# Altium PCB ZERO.PcbDoc
Units mil, origin at the board's own origin, x right, y up, seen from the top; angles counter-clockwise.
Board outline 1865.19 x 1094.19 mil, 2 copper layers (Top Layer, Bottom Layer); 47 components, 42 nets, 267 pads, 78 vias.
Unrouted connection lines stored in the file: 47.
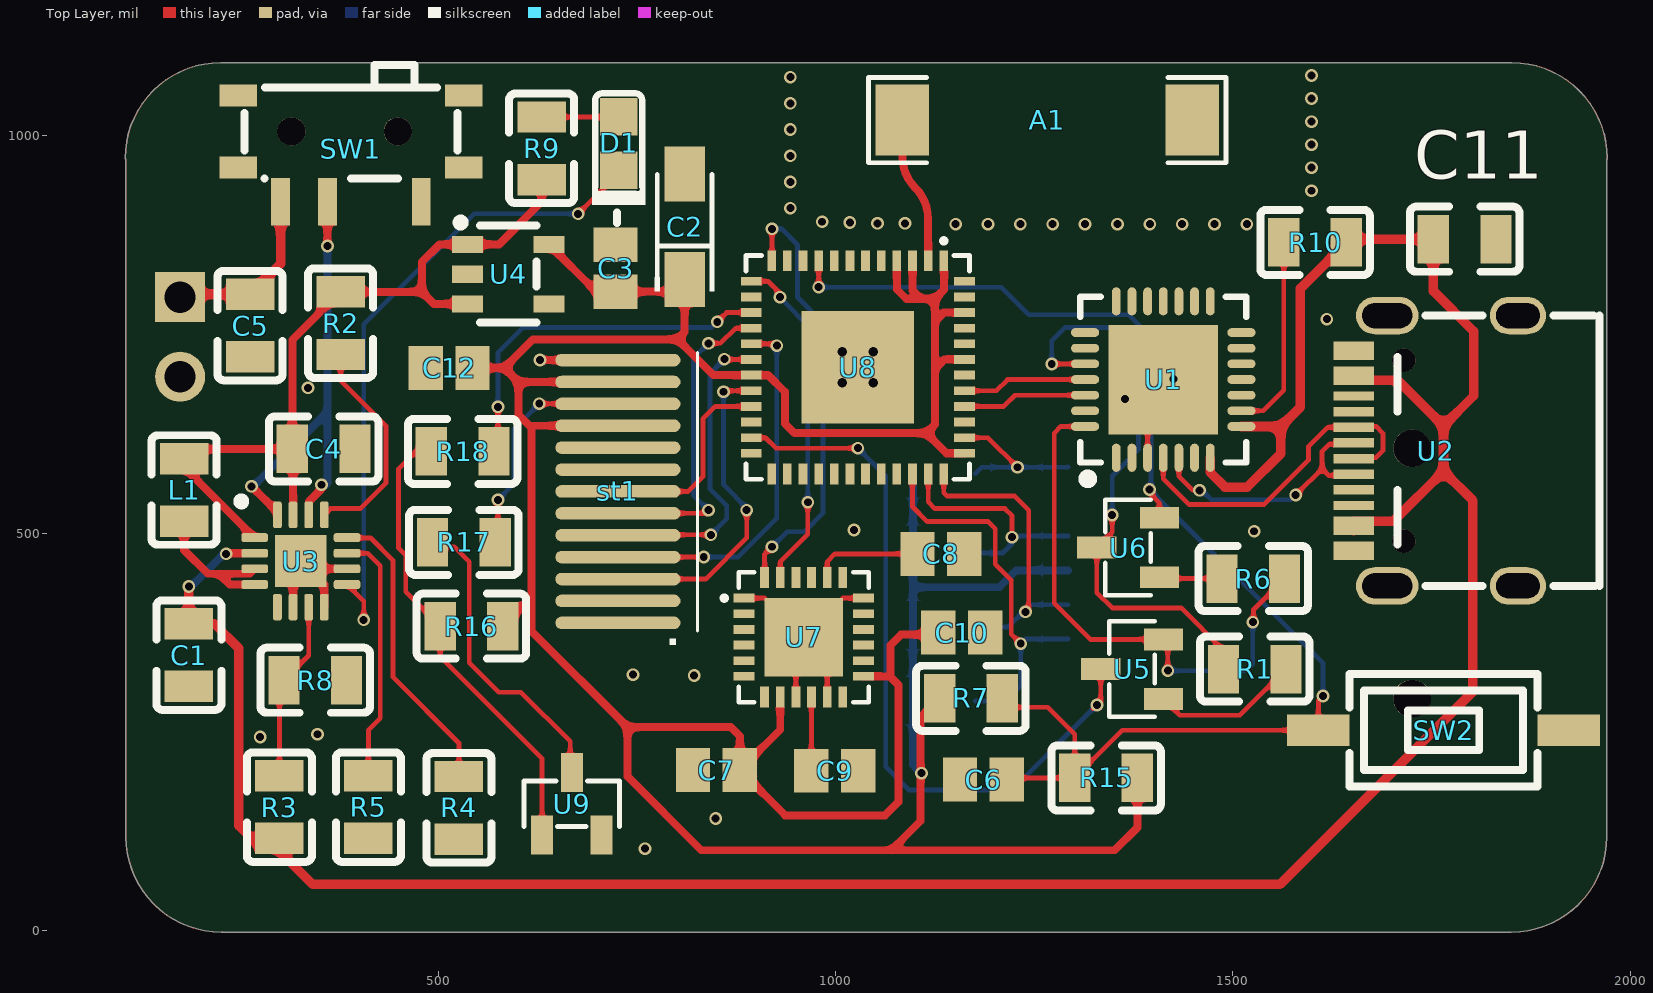
[diagram p0: Top Layer view]
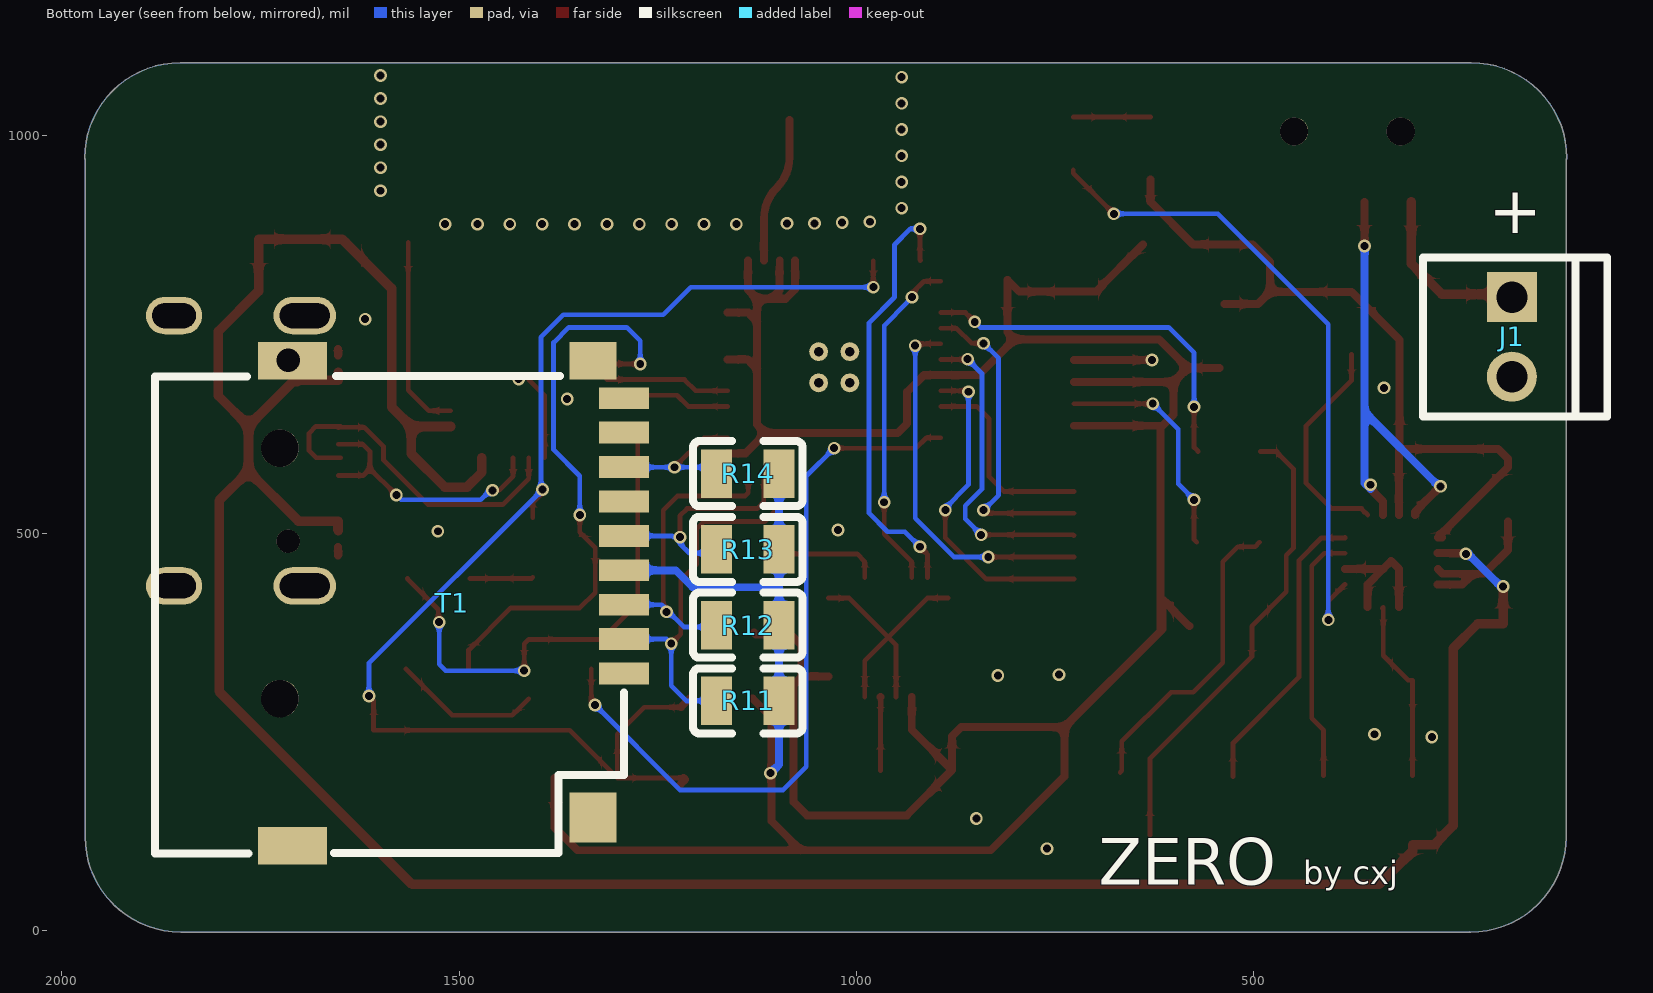
[diagram p1: Bottom Layer view, seen from below]
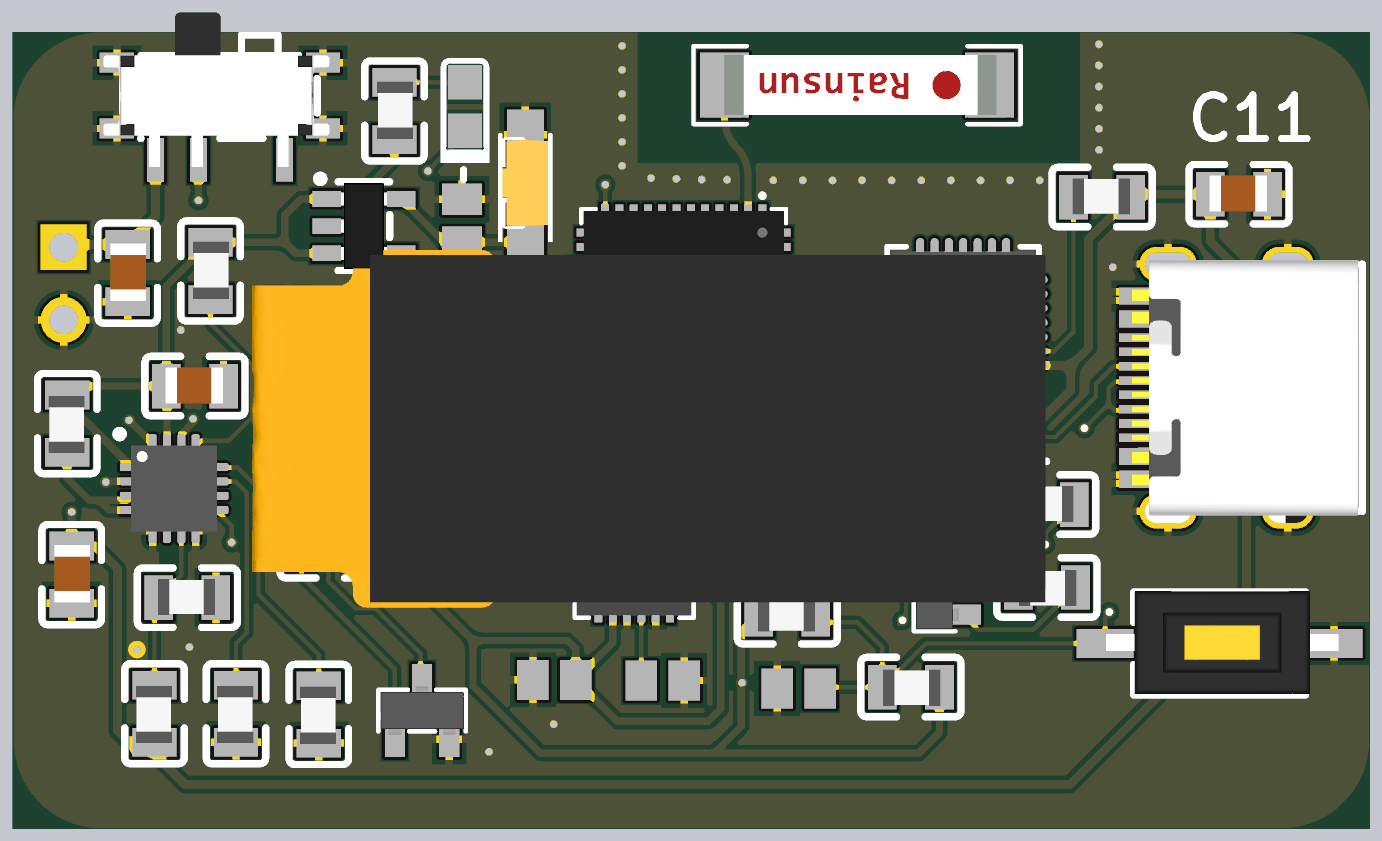
[diagram p2: 3D render of the assembled board from above, using the file's embedded part models]
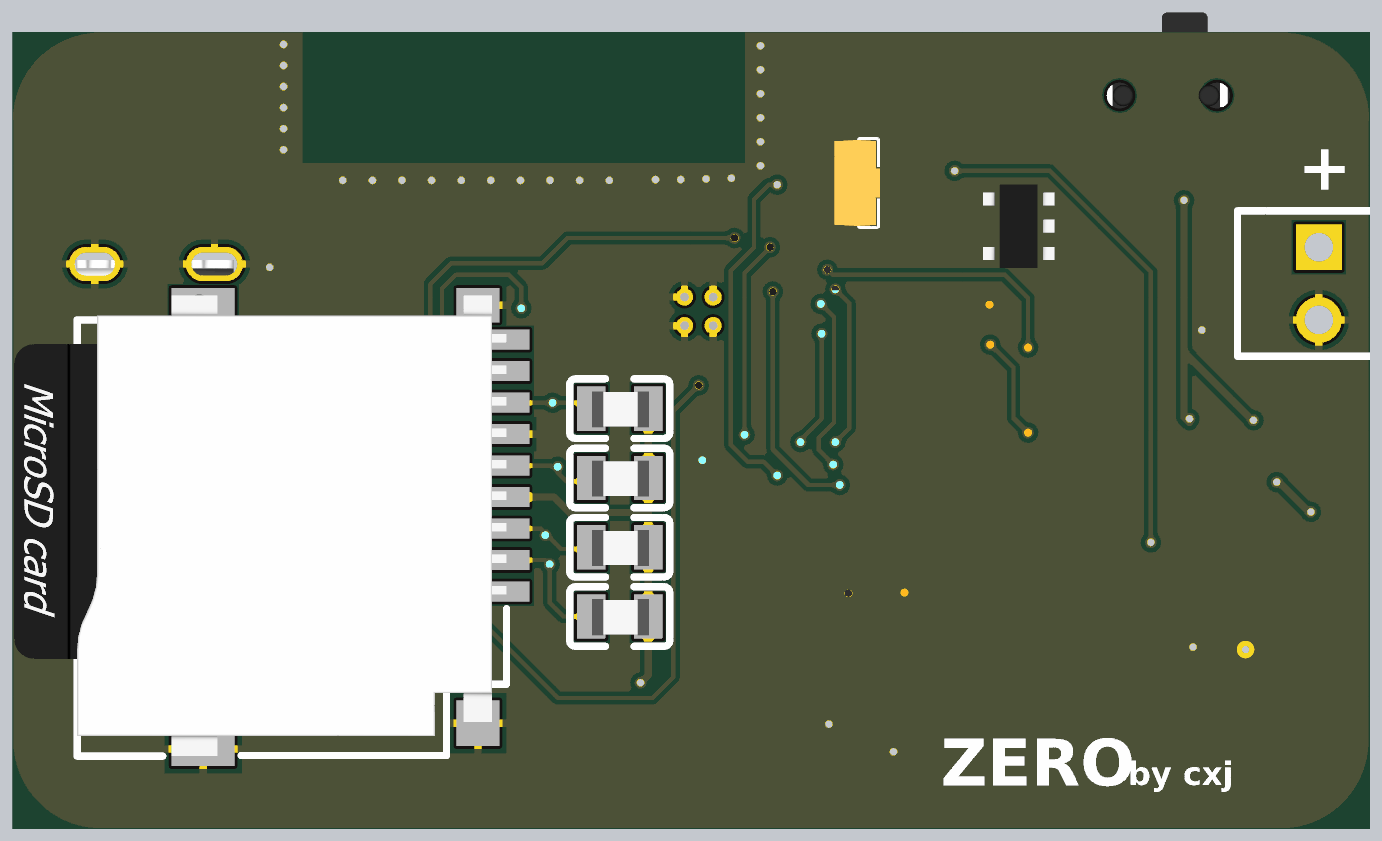
[diagram p3: 3D render of the assembled board from below, using the file's embedded part models]

## Layer stack, top to bottom
Top Solder: solder mask 0.4, Solder Resist, Dk 3.5
Top Layer: signal copper 1.4
Dielectric 1: dielectric 12.6, FR-4, Dk 4.8
Bottom Layer: signal copper 1.4
Bottom Solder: solder mask 0.4, Solder Resist, Dk 3.5

## Board outline
106.91,118 ccw(c227,118) 227,-2.09 ccw(c227,-0.11) 228.09,-1.76 ccw(c229,0) 229,-1.98 1850.37,-1.98 ccw(c1850.39,0) 1850.39,-1.98 ccw(c1850.39,118.11) 1970.49,118.11 ccw(c1968.5,118.11) 1970.49,118.13 1970.49,970.57 ccw(c1969.11,972) 1971.09,972 ccw(c1851,972) 1851,1092.09 226,1092.09 ccw(c226,972) 105.91,972 ccw(c107.89,972) 106.91,970.28

## Design rules (kind name [scope] priority, off if disabled: settings)
Clearance [All] p1: gap=6 ignorepadtopadclearanceinfootprint=FALSE except(10: Arc-Arc Arc-Track Track-Track)
ComponentClearance [All] p1 off: gap=10 collisioncheckmode=3 verticalgap=10 showdistances=FALSE
MinimumSolderMaskSliver [Not InComponent('U2','U7','A1','T1','U1','U3','U8')] p1: minsoldermaskwidth=2
PolygonConnect [All] p1: thpad.connectstyle=Relief thpad.reliefconductorwidth=10 thpad.reliefentries=4 thpad.polygonreliefangle="90 Angle" thpad.airgapwidth=10 smdpad.connectstyle=Relief smdpad.reliefconductorwidth=10 smdpad.reliefentries=4 smdpad.polygonreliefangle="90 Angle" smdpad.airgapwidth=10 via.connectstyle=Direct via.reliefconductorwidth=10 via.reliefentries=4 via.polygonreliefangle="90 Angle" via.airgapwidth=10
RoutingVias [All] p1: holewidth=8 width=16 viastyle="Through Hole" minholewidth=6 minwidth=12 maxholewidth=28 maxwidth=50
SolderMaskExpansion [All] p1: expansion=4 istentingtop=FALSE
Width [All] p1: maxlimit=50 minlimit=6 preferedwidth=6
28 further rules are at their usual default settings.

## Components (designator, comment, footprint, x,y, rotation, side; value= is the part's Value field where it differs from the comment)
A1 "AN9520-245" AN9520-245 1266.28,1020 r180 top
C1 "10uf" C0805#1 151.94,282.73 r90 top
C2 "10uf" C+ 810,885.39 r270 top
C3 "0.1uf" C0805#2 723,833.47 r270 top
C4 "22uf" C0805#1 419.53,571.94 r180 top
C5 "1uf" C0805#1 228.94,697.47 r90 top
C6 "1uf" C0805#2 1186,190 r180 top
C7 "10nf" C0805#2 850,202 r0 top
C8 "2.2nf" C0805#2 1132.53,474 r0 top
C9 "0.1uf" C0805#2 999,201 r180 top
C10 "0.1uf" C0805#2 1158.53,375 r180 top
C11 "?" C0805#1 1855.53,835.94 r180 top
C12 "1uf" C0805#2 513.47,708 r180 top
D1 "LED 蓝 0805" "LED 蓝  0805" 757,917.47 r90 top
J1 "2.54_2P" 2.54-2P 174.99,747 r270 bottom
L1 "2.2uh" R0805 214.06,618.27 r270 top
R1 "10k" R0805 1463.47,363.06 r0 top
R2 "10K" R0805 342.94,700.47 r90 top
R3 "10k" R0805 334.06,219.27 r270 top
R4 "2K" R0805 560.06,218.27 r270 top
R5 "500" R0805 446.06,219.27 r270 top
R6 "10k" R0805 1589.53,408.94 r180 top
R7 "10k" R0805 1234.18,258.23 r180 top
R8 "10k" R0805 409.01,280.94 r180 top
R9 "2.2K" R0805 595.94,920.47 r90 top
R10 "10k" R0805 1667.27,831.94 r180 top
R11 "10k" R0805 1200.53,323.06 r180 bottom
R12 "10k" R0805 1200.53,418.39 r180 bottom
R13 "10k" R0805 1200.53,513.72 r180 bottom
R14 "10k" R0805 1200.53,609.06 r180 bottom
R15 "4.7k" R0805 1276.47,226.06 r0 top
R16 "10k" R0805 605.53,348.94 r180 top
R17 "10" R0805 468.23,522.56 r0 top
R18 "1k" R0805 594.53,568.94 r180 top
st1 "st7735s" st7735s 796,362.2 r0 top locked
SW1 "SW-TH_MSK12C02" SW-TH_MSK12C02 390,984 r180 top
SW2 "SW" SW 1765,252 r0 top
T1 "TF PUSH" TF-SMD_TF-PUSH 1501,412 r270 bottom locked
U1 "CP2102_GMR" CP2102_GMR 1412.31,693.42 r0 top
U2 "TYPE-C" USB-C 1755.39,603.78 r90 top
U3 "ETA6003" ETA6003 252,540 r0 top
U4 "ME6212C33M5G_JX" ME6212C33M5G_JX 588,826 r180 top
U5 "S8050_C908252" s8050 1373,329 r0 top
U6 "S8050_C908252" s8050 1368,482 r0 top
U7 "MPU6050" MPU6050 959.84,369.1 r270 top
U8 "ESP32-PICO-D4" ESP32-PICO-D4 1027.84,708.85 r180 top
U9 "S8050_C908252" s8050 668,159.63 r270 top

## Footprints (in the part's own frame and the unit in brackets; to place one, negate y for a bottom-side part, rotate by r counter-clockwise, add the part's x,y. Pads: shape width x height; smd on the part's side, far side on the other; paste and mask are expansions set on the pad)
2.54-2P [mm] "P"
  rect 1.6x1.6 hole 1: 1(-1.27,0)
  round 1.6 hole 1: 2(1.27,0)
  silkscreen extent -2.54,-2.84 2.54,3.05
AN9520-245 [mm] "A?"
  rect 1.71x2.268 smd: 1(-4.63,0) 2(4.63,0)
  silkscreen extent -5.71,-1.36 5.71,1.36, body extent -4.88,-1.05 4.62,1.05, height 1.05
C0805#1 [mm] "C?"
  rect 1x1.55 smd: 1(0.623,-0.865) 2(2.623,-0.865)
  silkscreen extent -0.13,-1.91 3.37,0.18, body extent 0.65,-1.51 2.65,-0.26, height 0.6
C0805#2 [mm] "Chip Capacitor, Body 2.0x1.3mm, IPC High Density"
  rect 1.1x1.4 smd: 1(-0.75,0) 2(0.75,0)
  body extent -1.1,-0.72 1.1,0.72, height 1.4
C+ [mil] "C?"
  rect 69.19x51.02 smd: 1(66.39,0) 2(-66.39,0)
  silkscreen extent -66,-37 81,37, body extent -63,-31 63,32, height 31
CP2102_GMR [mm] "QFN-28_L5.0-W5.0-P0.50-BL-EP"
  oval 0.28x0.9 smd: 1(-1.501,-2.5) 2(-1.001,-2.5) 3(-0.501,-2.5) 4(0,-2.5) 5(0.5,-2.5) 6(1.001,-2.5) 7(1.501,-2.5) 15(1.501,2.5) 16(1.001,2.5) 17(0.5,2.5) 18(0,2.5) 19(-0.501,2.5) 20(-1.001,2.5) 21(-1.501,2.5)
  oval 0.9x0.28 smd: 8(2.5,-1.501) 9(2.5,-1.001) 10(2.5,-0.5) 11(2.5,0) 12(2.5,0.5) 13(2.5,1.001) 14(2.5,1.501) 22(-2.5,1.501) 23(-2.5,1.001) 24(-2.5,0.5) 25(-2.5,0) 26(-2.5,-0.5) 27(-2.5,-1.001) 28(-2.5,-1.501)
  rect 3.5x3.5 smd: 29(0,0)
  silkscreen extent -2.65,-3.33 2.65,2.65, body extent -4.44,-2.5 2.5,2.5, height 1
ESP32-PICO-D4 [mm] "U?"
  rect 0.28x0.665 smd: 1(-2.75,-3.408) 2(-2.25,-3.408) 3(-1.75,-3.408) 4(-1.25,-3.408) 5(-0.75,-3.408) 6(-0.25,-3.408) 7(0.25,-3.408) 8(0.75,-3.408) 9(1.25,-3.408) 10(1.75,-3.408) 11(2.25,-3.408) 12(2.75,-3.408) 25(2.75,3.408) 26(2.25,3.408) 27(1.75,3.408) 28(1.25,3.408) 29(0.75,3.408) 30(0.25,3.408) 31(-0.25,3.408) 32(-0.75,3.408) 33(-1.25,3.408) 34(-1.75,3.408) 35(-2.25,3.408) 36(-2.75,3.408)
  rect 0.665x0.28 smd: 13(3.408,-2.75) 14(3.408,-2.25) 15(3.408,-1.75) 16(3.408,-1.25) 17(3.408,-0.75) 18(3.408,-0.25) 19(3.408,0.25) 20(3.408,0.75) 21(3.408,1.25) 22(3.408,1.75) 23(3.408,2.25) 24(3.408,2.75) 37(-3.408,2.75) 38(-3.408,2.25) 39(-3.408,1.75) 40(-3.408,1.25) 41(-3.408,0.75) 42(-3.408,0.25) 43(-3.408,-0.25) 44(-3.408,-0.75) 45(-3.408,-1.25) 46(-3.408,-1.75) 47(-3.408,-2.25) 48(-3.408,-2.75)
  round 0.6 hole 0.3: 49(-0.5,0.5) 49(-0.5,-0.5) 49(0.5,0.5) 49(0.5,-0.5)
  rect 3.6x3.6 smd: 49(0,0)
  silkscreen extent -3.58,-4.11 3.58,3.58, body extent -3.51,-3.51 3.51,3.51, height 0.78
ETA6003 [mm]
  rrect50% 0.85x0.28 smd: 1(0.43,-1.155) 2(0.43,-1.655) 3(0.43,-2.155) 4(0.43,-2.655) 9(3.38,-2.655) 10(3.38,-2.155) 11(3.38,-1.655) 12(3.38,-1.155)
  rrect50% 0.28x0.85 smd: 5(1.155,-3.38) 6(1.655,-3.38) 7(2.155,-3.38) 8(2.655,-3.38) 13(2.655,-0.43) 14(2.155,-0.43) 15(1.655,-0.43) 16(1.155,-0.43)
  rect 1.65x1.65 smd: 17(1.905,-1.905)
  silkscreen extent -0.13,-0.13 0.13,0.13, body extent 0.41,-3.4 3.41,-0.4, height 0.98
"LED 蓝  0805" [mm]
  rect 1.2x1.2 smd paste+0 mask+0: 1(2.704,0.762) 2(1.004,0.762)
  silkscreen extent -0.69,-0.09 3.46,1.61, body extent 0.93,0.23 2.94,1.3, height 0.46
ME6212C33M5G_JX [mm] "U?"
  rect 1x0.55 smd: 1(1.3,-0.95) 2(1.3,0) 3(1.3,0.95) 4(-1.3,0.95) 5(-1.3,-0.95)
  silkscreen extent -0.9,-1.78 1.65,1.55, body extent -1.25,-1.5 1.25,1.5, height 0.55
MPU6050 [mm] "U?"
  rect 0.28x0.665 smd: 1(-1.25,-1.907) 2(-0.75,-1.907) 3(-0.25,-1.907) 4(0.25,-1.907) 5(0.75,-1.907) 6(1.25,-1.907) 13(1.25,1.907) 14(0.75,1.907) 15(0.25,1.907) 16(-0.25,1.907) 17(-0.75,1.907) 18(-1.25,1.907)
  rect 0.665x0.28 smd: 7(1.907,-1.25) 8(1.907,-0.75) 9(1.907,-0.25) 10(1.907,0.25) 11(1.907,0.75) 12(1.907,1.25) 19(-1.907,1.25) 20(-1.907,0.75) 21(-1.907,0.25) 22(-1.907,-0.25) 23(-1.907,-0.75) 24(-1.907,-1.25)
  rect 2.5x2.5 smd: 25(0,0)
  silkscreen extent -2.08,-2.61 2.08,2.08, body extent -2.02,-2.03 2.02,2.01, height 0.88
R0805 [mm] "R?"
  rect 1x1.55 smd: 1(0.623,-0.865) 2(2.623,-0.865)
  silkscreen extent -0.13,-1.91 3.37,0.18, body extent 0.65,-1.52 2.65,-0.26, height 0.43
s8050 [mm] "SOT-23-3_L2.9-W1.3-P1.90-LS2.4-BR"
  rect 1.25x0.7 smd: 1(1,-0.95) 2(1,0.95) 3(-1,0)
  silkscreen extent -0.73,-1.53 0.73,1.53, body extent -1.23,-1.46 1.25,1.46, height 0.65
st7735s [mm] "st7735s?"
  oval 4x0.4 smd: 1(-1.778,0.635) 2(-1.778,1.335) 3(-1.778,2.035) 5(-1.778,3.435) 6(-1.778,4.135) 7(-1.778,4.835) 8(-1.778,5.535) 9(-1.778,6.235) 10(-1.778,6.935) 11(-1.778,7.635) 12(-1.778,8.335) 13(-1.778,9.035)
  oval 4x0.4 smd paste+0: 4(-1.778,2.735)
  silkscreen extent -0.13,-0.07 0.76,9.27, body extent -9.19,-1.55 18.53,10.95, height 1.55
SW [mm] "TSA363G25-250B"
  rect 2x1 smd: 1(-4,0) 2(4,0)
  silkscreen extent -3,-1.8 3,1.8, body extent -3.98,-1.77 4.16,1.83, height 2.49
SW-TH_MSK12C02 [mm]
  rect 0.6x1.524 smd: 1(-2.25,1.7) 2(0.75,1.7) 3(2.25,1.7)
  rect 1.2x0.7 smd: 4(-3.6,-1.7) 4(-3.6,0.6) 4(3.6,-1.7) 4(3.6,0.6)
  round 0.9 hole 0.9 unplated: ""(-1.5,-0.55) ""(1.905,-0.55)
  silkscreen extent -3.4,-2.67 3.4,0.95, body extent -3.82,-3.45 4.08,1.94, height 1.4
TF-SMD_TF-PUSH [mm] "T?"
  rect 0.7x1.6 smd: 1(2.25,5.3) 2(1.15,5.3) 3(0.05,5.3) 4(-1.05,5.3) 5(-2.15,5.3) 6(-3.25,5.3) 7(-4.35,5.3) 8(-5.45,5.3) CD(-6.55,5.3)
  rect 1.2x1.5 smd: 10(-7.75,4.3)
  rect 1.2x2.2 smd: 11(-7.75,-5.3) 12(7.75,-5.3)
  rect 1.6x1.5 smd: 13(6.85,4.3)
  round 1.2 hole 1.2 unplated: ""(-4.95,-5.7) ""(3.05,-5.7)
  silkscreen extent -7.26,-9.7 8,5.3, body extent -8.1,-11.9 8,5.3, height 2.2
USB-C [mm] "TYPE-C-31-M-12"
  oval 1.2x1.8 hole 0.8 slot 1.4 at 90 deg: 0(-4.32,-2.624) 0(4.32,-2.624)
  oval 1.2x2 hole 0.8 slot 1.6 at 90 deg: 0(-4.32,1.556) 0(4.32,1.556)
  rect 0.3x1.3 smd: A1(-3.35,2.623) A4(-2.55,2.623) A5(-1.25,2.623) A6(-0.25,2.623) A7(0.25,2.623) A8(1.25,2.624) A9(2.55,2.623) A12(3.35,2.623) B1(3.05,2.623) B4(2.25,2.623) B5(1.75,2.623) B6(0.75,2.623) B7(-0.75,2.623) B8(-1.75,2.624) B9(-2.25,2.623) B12(-3.05,2.623)
  round 0.75 hole 0.75 unplated: ""(-2.89,1.026) ""(2.89,1.026)
  silkscreen extent -4.32,-5.23 4.32,1.22, body extent -4.47,-5.08 4.47,2.82, height 3.25

## Part data
C1 C3 C4 C5 C6 C7 C8 C9 C10 C11 C12: library part C0805
C2: library part C+
L1 R1 R2 R3 R4 R5 R6 R7 R8 R9 R10 R11 R12 R13 R14 R15 R16 R17 R18: library part R0805
U2: "TYPE-C-31-M-12"
U5 U6 U9: library part s8050

## Via types
v1: diameter 16, hole 10, Top Layer to Bottom Layer, tented both sides, 77 vias
v2: diameter 16, hole 10, Top Layer to Bottom Layer, 1 vias

## Nets (pads, with @x,y where several pads share a name; then routed paths per layer and width w, separated by ;. In a path a pad name is that pad's centre, name@x,y a point inside that pad or via, vN(x,y) a via of type N, cw(c..) or ccw(c..) an arc to the next point about the centre after c; other vN are vias at no path point)
+3.3: C2.1 C3.2 C7.2 C10.2 C12.1 R7.2 R11.2 R12.2 R13.2 R14.2 R15.2 R16.1 st1.10 st1.12 T1.4 U4.5 U7.8 U7.13 U8.1 U8.3 U8.4 U8.19 U8.37 U8.43 U8.46 | length 4739.4
  Top Layer w10: C12.1 583,708 ; R16.1 614.76,416.76 614.76,379.24 617,377 ; U4.5 698.64,803.94 C3.2 794.94,803.94 C2.1 810,753 801,744 ; st1.10 617,635.24 ; st1.12 600.65,690.35 ; U7.8 930.32,252.79 C7.2 ; U7.13 1068,319.88 ; U8.4 1077.06,806.94 1089,795 1107,795 ; U8.3@1096.43,843 1096.43,834.72 1096.74,834.4 1096.74,805.26 1107,795 ; C10.2 1126.5,372.5 1082.5,372.5 1069,359 1069,318.9 1079,308.9 1079,162 1062,145 936.53,145 C7.2 ; R7.2 1107,268.37 1107,138 1070,101 ; U8.1@1136.43,843 1136.43,806.43 1125,795 ; U8.37 1139.42,600.58 1114,626 ; U8.43 1136.69,718.69 1125,707 ; U8.46 1135.74,777.74 1125,767 ; R15.2 1379.74,129.74 1351,101 1070,101 ; 583,708 600.65,690.35 ; 583,708 619,744 801,744 ; 600.65,690.35 600.65,649.35 614.76,635.24 617,635.24 ; 617,377 617,635.24 ; 617,377 738,256 ; 738,256 738,194 831,101 1070,101 ; 738,256 868,256 879.53,244.47 C7.2 ; 801,744 846,699 U8.19 915,699 936,678 936,638 948,626 1114,626 ; 1107,795 1125,795 ; 1114,626 1125,637 1125,707 ; 1125,707 1125,767 ; 1125,767 1125,795
  Bottom Layer w10: R14.2 R13.2 1097.26,432 ; v1(1108,198) 1097.26,208.74 R11.2 R12.2 1097.26,432 ; T1.4 1227.34,453.34 1206,432 1097.26,432
+5: C1.2 C11.2 R3.2 R10.1 U1.7 U1.8 U2.A4 U2.A9 U2.B4 U2.B9 U3.2 | length 3647.2
  Top Layer w10: v1@233.84,474.84 U3.2
  Top Layer w12: v1(186,433) C1.2 218,386 249,355 249,132 273,108 300,108 300,100 342,58 1559,58 1802,301 1802,541 1765,578 ; v1(233,474) v1@233.84,474.84 ; U1.7 1471.4,576.6 1490,558 1518,558 1560.32,600.32 1560.32,634.32 ; U1.8 1560.32,634.32 ; U2.A4 U2.B9 1702.2,515.2 1765,578 ; U2.A9@1652.1,702.86 U2.B4 1702.35,692.36 1703.91,690.8 1709.2,690.8 1765,635 ; 1560.32,634.32 1584.8,658.8 1584.8,808.06 R10.1 1646.74,870 C11.2 1752.26,804.74 1803,754 1803,673 1765,635 ; 1765,578 1765,635
  Bottom Layer w10: v1@189,433 v1@230,474
  Bottom Layer w12: v1(186,433) v1@189,433 ; v1@230,474 v1(233,474)
BATT: SW1.2 U3.14 U3.16 | length 597.4
  Top Layer w10: v1(265,559) 297.16,526.84 U3.16@297.16,523.07 ; U3.14@337.16,523.07 337.16,539.89 353,555.73 v1(353,561) ; v1(360.47,861.53) SW1.2
  Bottom Layer w10: v1(265,559) 267,559 360.47,652.47 ; v1(353,561) 353,555.86 360.47,563.34 360.47,652.47 ; v1(360.47,861.53) 360.47,652.47
BATT1: C5.2 J1.1 SW1.3 | length 221.8
  Top Layer w12: J1.1 178.73,800.74 C5.2 301.42,839.16 SW1.3
CP_RXD: U1.25 U8.41 | length 157.7
  Top Layer w6: U8.41 1202.32,679.32 1216.42,693.42 U1.25
CP_TXD: U1.26 U8.40 | length 157.7
  Top Layer w6: U8.40 1211.63,659.63 1225.72,673.72 U1.26
DTR: R6.1 U1.28 U5.2 | length 686.8
  Top Layer w6: U1.28 1283.32,634.32 1275,626 1275,412 1320.6,366.4 U5.2 1418,360.77 v1(1418,327) ; v1@1526,390 1526,404 R6.1
  Bottom Layer w6: v1(1418,327) 1517,327 1525,335 v1(1525,388)
EN: C6.1 R7.1 R15.1 SW2.1 U6.2 U8.9 | length 1698.2
  Top Layer w6: v1(978.63,809.63) U8.9 ; C6.1@1217.53,192 R15.1 ; R7.1@1220.94,281 1267,281 1301,247 R15.1 ; v1(1395,555) 1395,551 1407.37,538.63 U6.2 ; v1(1613.4,295.2) 1607.52,289.32 SW2.1 1361,252 R15.1
  Top Layer w10: R7.1 R7.1@1220.94,281 ; C6.1@1217.53,192 C6.1 C6.1@1221.53,184
  Bottom Layer w6: v1(978.63,809.63) 1208.37,809.63 1243,775 1368.63,775 1397,746.63 1397,557 v1(1395,555) 1613.4,336.6 v1(1613.4,295.2)
GND: C1.1 C2.2 C3.1 C4.1 C5.1 C6.2 C7.1 C8.2 C9.1 C10.1 C11.1 C12.2 J1.2 R4.2 R5.2 R8.1 st1.8 st1.13 SW1.4 SW2.2 T1.6 T1.10 T1.12 T1.13 U1.3 U1.29 U2.0 U2.A1 U2.A12 U2.B1 U2.B12 U3.5 U3.6 U3.8 U3.10 U3.17 U4.2 U7.1 U7.9 U7.11 U7.18 U7.25 U8.49 U9.2 | length 765.1
  Top Layer w6: U7.1 910.63,418.31 U7.25 ; U7.9 950,359.26 U7.25 ; U7.11 989.37,339.57 U7.25 ; U7.18 1009.06,418.31 U7.25 ; U1.3 1392.6,673.71 U1.29
  Top Layer w10: U3.6 317.16,455.16 U3.17 U3.17@336.84,455.16 ; U3.8 356.53,435.47 U3.17@336.84,455.16 ; U3.10 U3.17@336.84,455.16 ; v1(628,718) 725.91,718 st1.13 ; U2.A1 U2.B12@1652.11,482.39 ; U2.B1 U2.A12@1652.11,731.83
  Top Layer w20: U2.0@1690.29,433.7 U2.0@1694.13,433.7
  other v1: 760,103 849,141 348,247 822,321 745,322 1526.7,502.5 1023,504 1364,669 336,683 1425,694 1618.1,769.4 1151,889 1191.73,889 1232.45,889 1273.18,889 1313.91,889 1354.64,889 1395.36,889 1436.09,889 1476.82,889 1517.54,889 1052.63,890 1087.4,890 1017.87,891 983.1,892 943,909 1599,931 943,942 1599,960 943,975 1599,989 943,1008 1599,1018 943,1041 1599,1047 943,1074 1599,1076
  other v2: 275.8,243.6
IO0: U5.3 U8.23 | length 931.4
  Top Layer w6: U8.23 911.74,620.26 925,607 v1(1028,607) ; v1@1324,279 v1(1328.82,283.82) 1333.63,288.63 U5.3
  Bottom Layer w6: v1(1028,607) 1063,572 1063,206 1092,177 1222,177 v1(1328.82,283.82)
LEDK: R17.2 st1.11 | length 296.6
  Top Layer w6: R17.2 575,492 v1(575,542) ; v1(627,663) 627.2,662.8 st1.11
  Bottom Layer w6: v1(575,542) 595,562 595,631 v1(627,663)
MPU_SCL: U7.23 U8.13 | length 427.2
  Top Layer w6: U8.13 914.89,817.11 930,802 v1(930,797) ; U7.23 930.32,464.32 965,499 v1(965,539)
  Bottom Layer w6: v1(930,797) 936,791 936,790.37 965,761.37 v1@965,541
MPU_SDA: U7.24 U8.12 | length 556.3
  Top Layer w6: U7.24 910.63,473.63 v1(920,483) ; U8.12 919,843.58 920,844.58 v1(920,883)
  Bottom Layer w6: v1(920,483) 938.82,501.82 960.82,501.82 984,525 984,765 952,797 952,863 932,883 v1(920,883)
NetA1_2: A1.2 U8.2 | length 185.7
  Top Layer w10: A1.2 1084,973.63 ccw(c1138.63,973.63) 1100,935 cw(c1060.34,895.34) 1116.43,895.34 U8.2
NetC8_1: C8.1 U7.20 | length 158.9
  Top Layer w6: U7.20 989.37,464.37 999,474 C8.1 ; C8.1@1087,476 1101,476 C8.1@1096,481
NetC9_2: C9.2 U7.10 | length 93.1
  Top Layer w6: C9.2 U7.10@969.47,293.79
  Top Layer w10: U7.10@969.47,293.79 U7.10
NetD1_1: D1.1 R9.2 | length 97.1
  Top Layer w6: R9.2 726.81,1023.74 D1.1
NetD1_2: D1.2 U3.9 | length 828.8
  Top Layer w6: U3.9 406,414.54 v1(406,391) ; v1(676,902) 727,953 D1.2
  Bottom Layer w6: v1(406,391) 406,763 545,902 v1(676,902)
NetR1_2: R1.2 U5.1 | length 186.9
  Top Layer w6: U5.1 1432.97,271 1508.74,271 R1.2
NetR2_1: R2.1 U3.13 | length 279.6
  Top Layer w6: U3.13 364.46,531 402,531 434,563 434,635 377,692 R2.1
NetR4_1: R4.1 U3.12 | length 376.5
  Top Layer w6: U3.12 385.07,494 414.63,494 443,465.63 443,319 526,236 R4.1
NetR5_1: R5.1 U3.11 | length 319
  Top Layer w6: U3.11 411.16,474.84 427,459 427,267 412,252 R5.1
NetR6_2: R6.2 U6.1 | length 79.6
  Top Layer w6: U6.1 1408.97,443 R6.2
NetR10_2: R10.2 U1.9 | length 250
  Top Layer w6: U1.9 1538.02,654.02 1564,680 R10.2
NetR16_2: R16.2 R18.2 U9.1 | length 585.9
  Top Layer w6: R18.2 472,603 450,581 450,481.25 459,472.25 459,426.26 R16.2 502.26,344.74 630.6,216.4 U9.1
NetR17_1: R17.1 U9.3 | length 391.2
  Top Layer w6: R17.1 498.26,483 520,483 539,464 539,337 576,300 604,300 666,238 666,201 U9.3
NTC: R3.1 R8.2 U3.7 | length 232.3
  Top Layer w6: R3.1 R8.2@300,315 ; R8.2@300.48,315 R8.2 336.84,346.1 U3.7 U3.7@338.26,405.51
RTS: R1.1 U1.24 U6.3 | length 744.5
  Top Layer w6: v1(1272,713) 1313.76,713 U1.24 ; v1(1348,523) 1348,501.37 U6.3 1328.63,425.37 1348,406 1435,406 1488,353 R1.1
  Bottom Layer w6: v1(1272,713) 1272,742 1289,759 1362,759 1381,740 1381,605 1348,572 v1(1348,523)
SW: L1.2 U3.3 U3.4 | length 189.6
  Top Layer w10: L1.2 180,479 210,449 224,449 ; U3.3@268.21,454.84 262.37,449 224,449 ; U3.4 237.53,435.47 224,449
SYS: C4.2 L1.1 R2.2 R9.1 U3.1 U3.15 U4.1 U4.3 | length 1001.3
  Top Layer w10: U3.1@263.16,494.84 268.16,494.84 180,583 L1.1 192.26,606 C4.2 316.26,743 R2.2 479.26,803.74 ; U3.15 C4.2@317.16,606 ; U4.3 494.4,788.6 479.26,803.74 ; R9.1 630,917 576.4,863.4 U4.1 501.4,863.4 479.26,841.26 479.26,803.74
TF_CLK: R13.1 T1.5 U8.35 | length 306.9
  Top Layer w6: U8.35 1116.43,539.57 1125,531 1213,531 1222,522 1222,504 v1(1222,495)
  Bottom Layer w6: R13.1 1180.67,475 1210,475 1222,487 v1(1222,495) 1230,495 1231.64,496.64 T1.5
TF_CS: R11.1 T1.2 U8.34 | length 494.6
  Top Layer w6: U8.34 1096.74,533.26 1115.31,514.69 1192,514.69 1201,505.69 1201,461 1221,441 1221,373 v1(1233,361)
  Bottom Layer w6: R11.1 1214,289 1233,308 v1(1233,361) 1238.72,366.72 T1.2
TF_MISO: R14.1 T1.7 U8.38 | length 202.2
  Top Layer w6: U8.38 1191.74,620.26 v1(1229,583)
  Bottom Layer w6: R14.1 1184,583 v1(1229,583) 1292.08,583 T1.7
TF_MOSI: R12.1 T1.3 U8.36 | length 398.3
  Top Layer w6: U8.36 1136.11,550.89 1140,547 1225,547 1243,529 1242.9,528.9 1242.9,404.9 v1(1239,401)
  Bottom Layer w6: R12.1 1178.33,382 1217,382 1245.03,410.03 T1.3
TFT_BLK: R18.1 U8.15 | length 465.8
  Top Layer w6: R18.1 575,608 v1(575,659) ; v1(851,766) 862.74,777.74 U8.15
  Bottom Layer w6: v1(575,659) 575,727 607,759 844,759 v1(851,766)
TFT_CS: st1.7 U8.21 | length 254.8
  Top Layer w6: st1.7 814.56,552.56 833,571 833,644 848.63,659.63 U8.21
TFT_DC: st1.5 U8.18 | length 396.9
  Top Layer w6: st1.5 726.44,497 727.44,498 v1(843,498) ; v1(860,719) 865,719 865.31,718.69 U8.18
  Bottom Layer w6: v1(843,498) 863,518 863,534.28 842,555.28 842,701 v1(860,719)
TFT_RES: st1.6 U8.16 | length 403
  Top Layer w6: st1.6 836,525 v1(840,529) ; v1(840,739) 855,739 874.06,758.06 U8.16
  Bottom Layer w6: v1(840,529) 821,548 821,720 v1(840,739)
TFT_SCL: st1.4 U8.17 | length 474.9
  Top Layer w6: st1.4 726.12,470 v1(834,470) ; U8.17 923.63,738.37 v1(926,736) v1@930.25,736
  Bottom Layer w6: v1(834,470) 877,470 926,519 v1(926,736)
TFT_SDA: st1.3 U8.20 | length 413.8
  Top Layer w6: st1.3 836.32,442.32 888,494 v1(888,529) ; v1(859,678) 860.32,679.32 U8.20
  Bottom Layer w6: v1(859,678) 859,560.91 v1@889.45,530.45
USB_D+: U1.4 U2.A6 U2.B6 | length 436.1
  Top Layer w6: U1.4 1412.3,568.7 1445,536 1539,536 1595,592 1595,609 1619.31,633.31 U2.B6@1648.86,633.31 ; U2.A6@1648.86,595 1680,595 1688.75,603.75 1688.75,625.75 1680.13,634.37 U2.B6@1648.86,634.37 ; U2.B6@1651.8,633 U2.B6
USB_D-: U1.5 U2.A7 U2.B7 | length 342.7
  Top Layer w6: U1.5 1432,571.63 1447.63,556 1449.63,554 v1(1458,554) ; v1@1581,549.59 1581,550 1612.25,581.25 ; U2.B7@1652.14,572.63 1620.87,572.63 1612.25,581.25 ; U2.A7@1652.14,612 1621,612 1612.25,603.25 1612.25,581.25
  Bottom Layer w6: v1@1458.62,550.62 1459,551 1458,552 v1(1458,554) 1461,554 1473,542 1573,542 v1(1579,548)
pads on no net: A1.1 st1.1 st1.2 st1.9 SW1. SW1.1 T1. T1.1 T1.8 T1.11 T1.CD U1.1 U1.2 U1.6 U1.10 U1.11 U1.12 U1.13 U1.14 U1.15 U1.16 U1.17 U1.18 U1.19 U1.20 U1.21 U1.22 U1.23 U1.27 U2. U2.A5 U2.A8 U2.B5 U2.B8 U4.4 U7.2 U7.3 U7.4 U7.5 U7.6 U7.7 U7.12 U7.14 U7.15 U7.16 U7.17 U7.19 U7.21 U7.22 U8.5 U8.6 U8.7 U8.8 U8.10 U8.11 U8.14 U8.22 U8.24 U8.25 U8.26 U8.27 U8.28 U8.29 U8.30 U8.31 U8.32 U8.33 U8.39 U8.42 U8.44 U8.45 U8.47 U8.48

## Polygon pours and split planes (outlines as drawn)
GND on Top Layer "Top Layer-No Net" (solid, remove dead copper, shelved, pour order 1): 106.91,118 ccw(c227,118) 227,-2.09 ccw(c227,-0.11) 228.09,-1.76 ccw(c229,0) 229,-1.98 1850.37,-1.98 ccw(c1850.39,0) 1850.39,-1.98 ccw(c1850.39,118.11) 1970.49,118.11 ccw(c1968.5,118.11) 1970.49,118.13 1970.49,970.57 ccw(c1969.11,972) 1971.09,972 ccw(c1851,972) 1851,1092.09 226,1092.09 ccw(c226,972) 105.91,972 ccw(c107.89,972) 106.91,970.28
GND on Bottom Layer "Top Layer-No Net1" (solid, remove dead copper, shelved, pour order 2): 106.91,118 ccw(c227,118) 227,-2.09 ccw(c227,-0.11) 228.09,-1.76 ccw(c229,0) 229,-1.98 1850.37,-1.98 ccw(c1850.39,0) 1850.39,-1.98 ccw(c1850.39,118.11) 1970.49,118.11 ccw(c1968.5,118.11) 1970.49,118.13 1970.49,970.57 ccw(c1969.11,972) 1971.09,972 ccw(c1851,972) 1851,1092.09 226,1092.09 ccw(c226,972) 105.91,972 ccw(c107.89,972) 106.91,970.28

## Other copper
Top Layer:
  pour cut-out: 286.4,371.4
  pour cut-out: 306.6,388.3 306.3,388 306.3,351.5 326.5,351.5 326.5,390.8 307.5,390.8 305,388.3 305,386.5
  pour cut-out: 964,1092.1
  pour cut-out: 964,1092.1
  pour cut-out: 964,1092.1
  pour cut-out: 964,913.1 964.2,912.9 1572.9,912.9 1572.9,1091.9 1572.7,1092.1 964,1092.1
Bottom Layer:
  pour cut-out: 965,914
  pour cut-out: 964,1092.09 964,913 1573,913 1573,1092.09

## Silkscreen, mask and mechanical layers (free items; w line width, h text height)
Bottom Overlay:
  text "+" at 204,857.78 h100
  text "by cxj" at 437.68,48.14 h50
  text "ZERO" at 695.1,38.2 h100
Mechanical 1:
  lines w3.94: 107.89,972 cw(c226,972) 226,1090.11 1851,1090.11 cw(c1851,972) 1969.11,972 ; 108.89,972 108.89,118 ccw(c227,118) 227,-0.11 ; 229,0 1850.39,0 ccw(c1850.39,118.11) 1968.5,118.11 1968.5,972